# Altium PCB Board.PcbDoc
Units mm, origin at the board's own origin, x right, y up, seen from the top; angles counter-clockwise.
Board outline 100.1 x 45.5 mm, 4 copper layers (Top Layer, Gnd top, Gnd bot, Bottom Layer), stack 1.587 mm thick; 40 components, 18 nets, 112 pads, 31 vias.
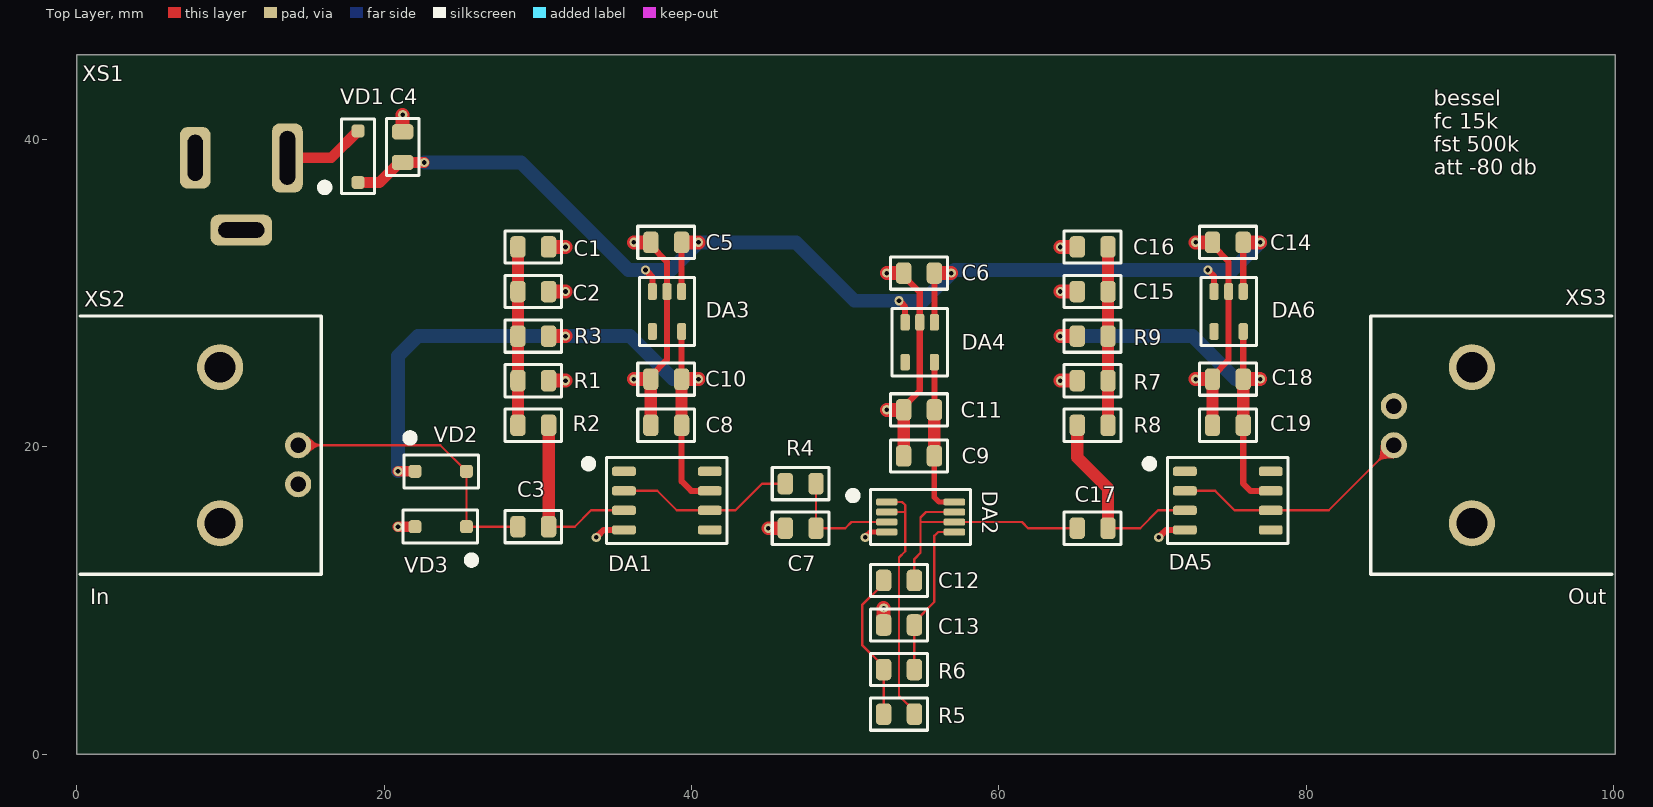
[diagram p0: Top Layer view]
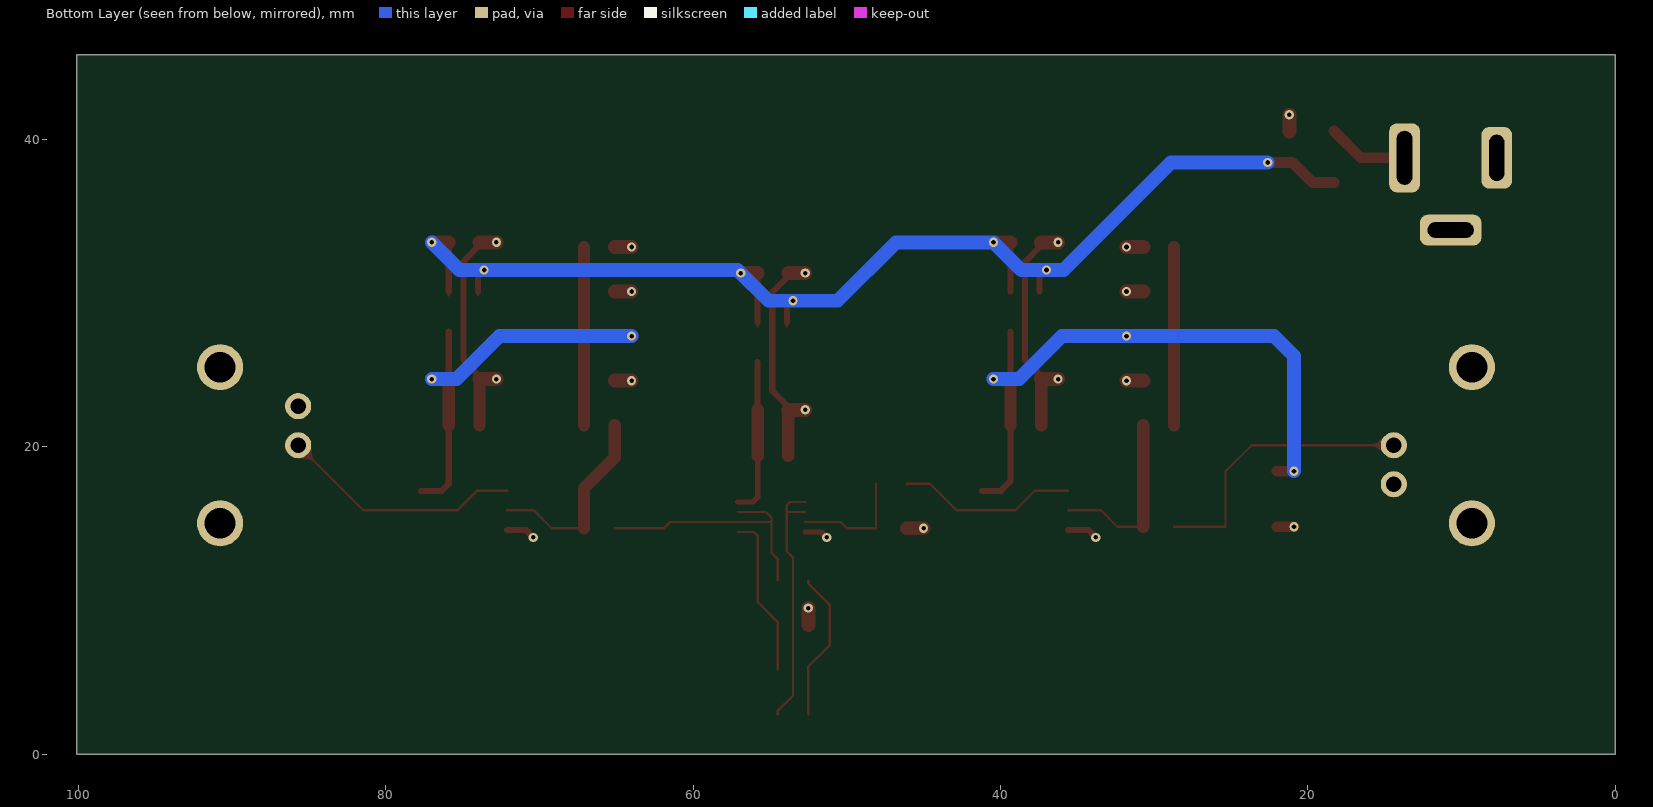
[diagram p1: Bottom Layer view, seen from below]
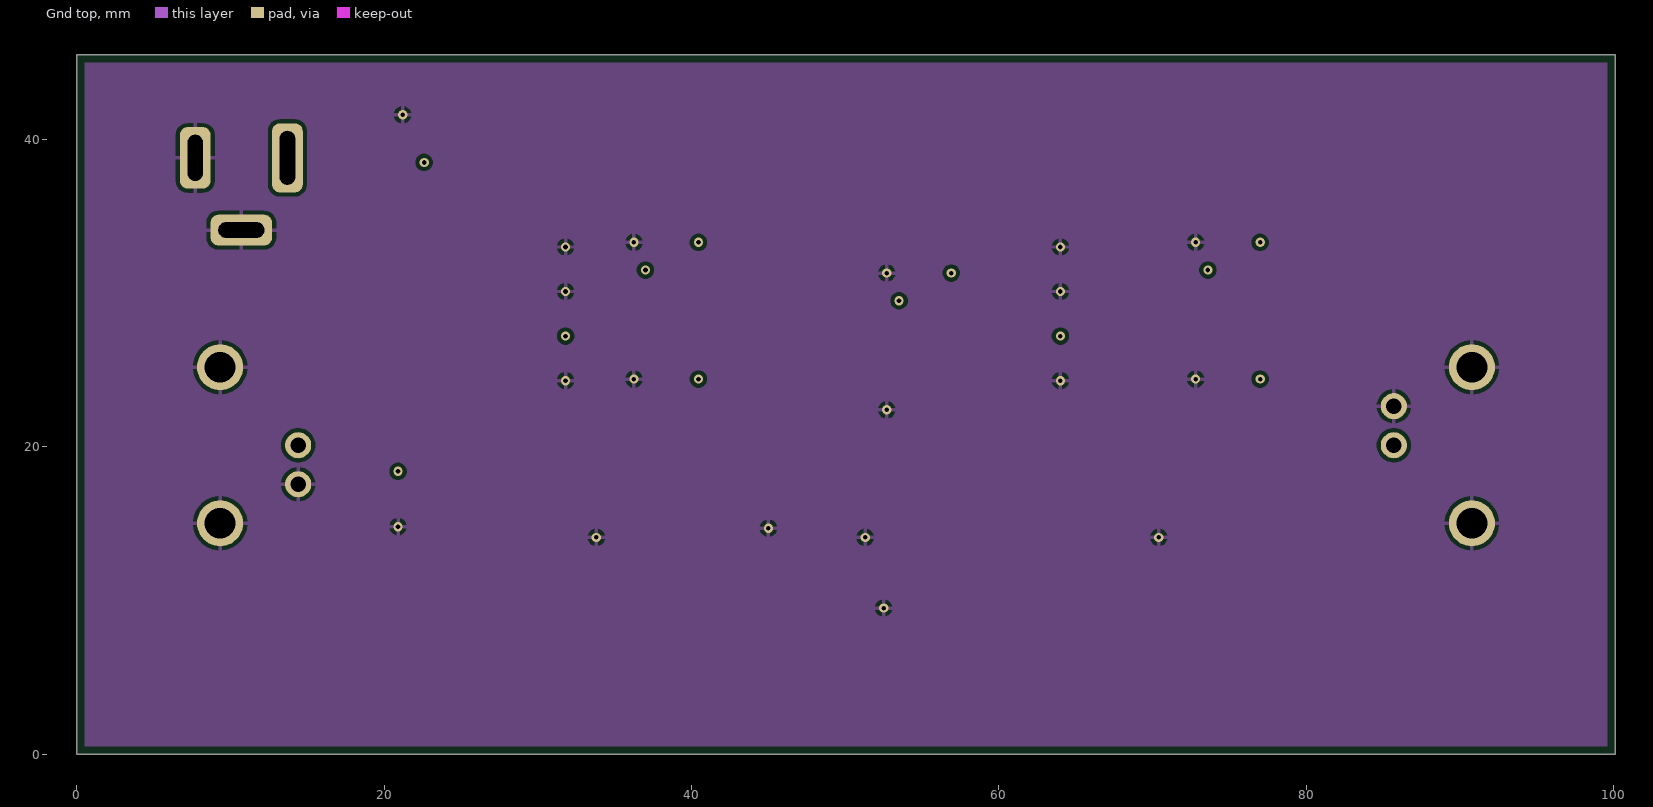
[diagram p2: Gnd top]
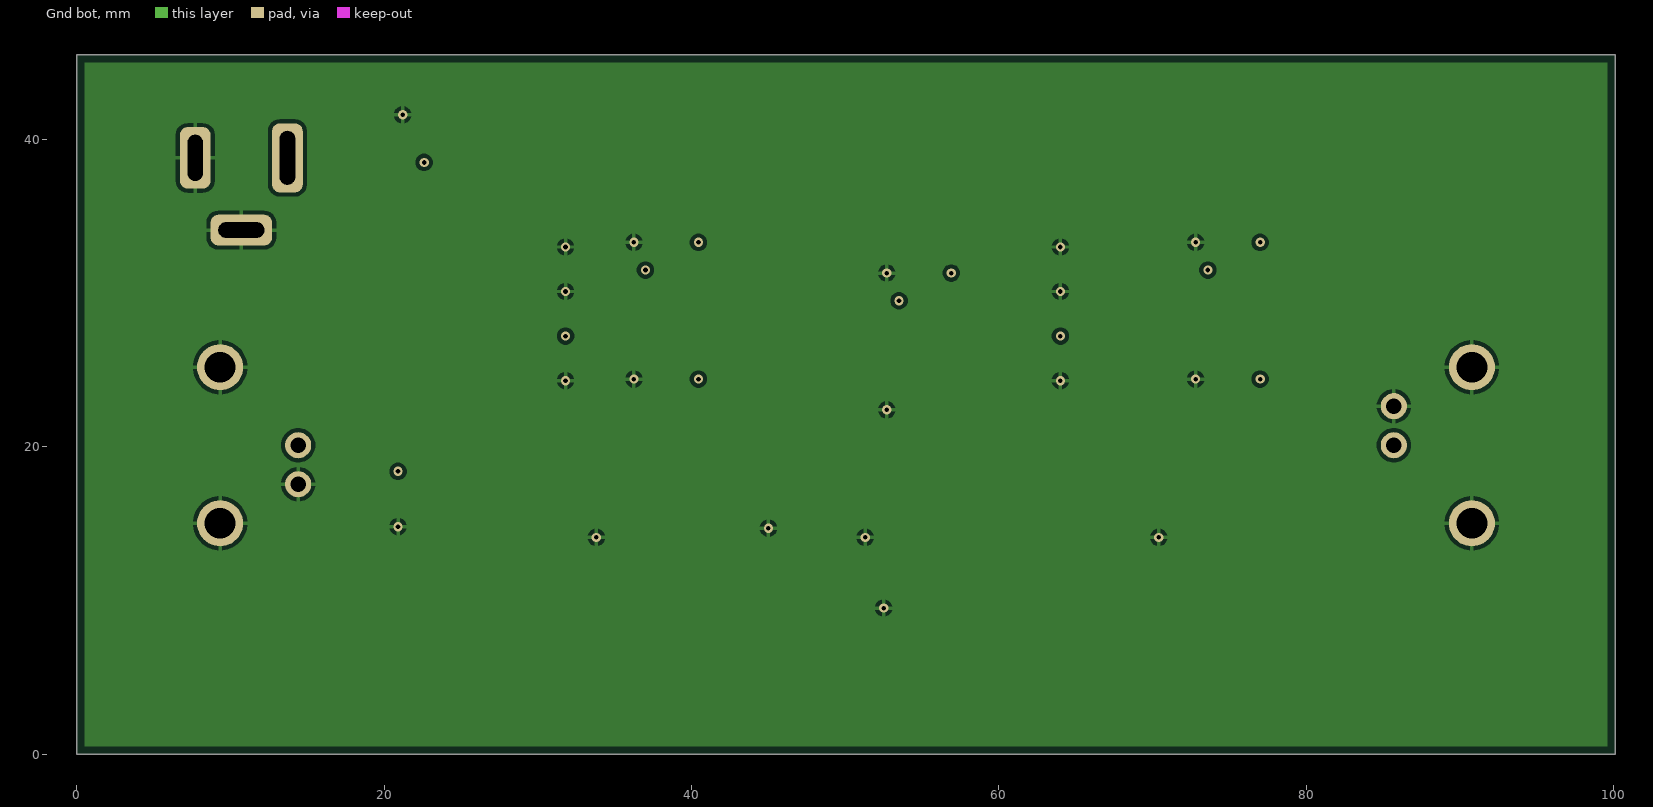
[diagram p3: Gnd bot]
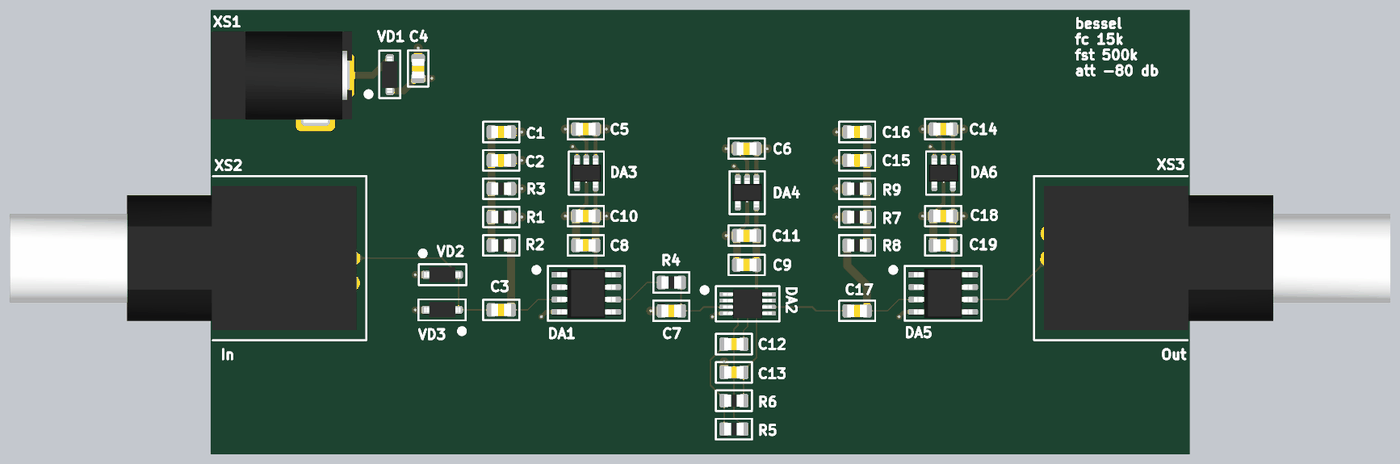
[diagram p4: 3D render of the assembled board from above, using the file's embedded part models]

## Layer stack, top to bottom
Top Solder: solder mask 0.0102, Solder Resist, Dk 3.3
Top Layer: signal copper 0.0356
Dielectric 2: prepreg 0.2104, PP-006, Dk 4.4
Gnd top: signal copper 0.0152
Dielectric 1: dielectric 1.065, FR-4, Dk 4.6
Gnd bot: signal copper 0.0152
Dielectric 3: prepreg 0.2104, PP-006, Dk 4.4
Bottom Layer: signal copper 0.0356
Bottom Solder: solder mask 0.0102, Solder Resist, Dk 3.3

## Board outline
0,0 100.1,0 100.1,45.5 0,45.5

## Design rules (kind name [scope] priority, off if disabled: settings)
Clearance [All] p1: gap=0.254 ignorepadtopadclearanceinfootprint=FALSE except(0: Arc-Hole Track-Hole SMDPad-Hole THPad-Hole Via-Hole Fill-Hole Poly-Hole Region-Hole Text-Hole; 0.1: Arc-Arc Arc-Track Arc-THPad Track-Track Track-THPad SMDPad-THPad; 0.15: Arc-SMDPad Track-SMDPad SMDPad-SMDPad; 0.2: Arc-Via Track-Via SMDPad-Via THPad-Via Via-Via)
HoleSize [All] p1: absolutevalues=TRUE maxlimit=6.3 minlimit=0.15 maxpercent=80.000 minpercent=20.000
HoleToHoleClearance [All] p1: gap=0.45 allowstackedmicrovias=TRUE
MinimumSolderMaskSliver [All] p1: minsoldermaskwidth=0.1
PolygonConnect [All] p1: connectstyle=Relief reliefconductorwidth=0.254 reliefentries=4 polygonreliefangle="90 Angle" airgapwidth=0.254
RoutingVias [All] p1: holewidth=0.3 width=0.6 viastyle="Through Hole" minholewidth=0.15 minwidth=0.3 maxholewidth=0.3 maxwidth=0.6
SilkToSilkClearance [All] p1: silktosilkclearance=0.15
SilkToSolderMaskClearance [IsPad] p1: minsilkscreentomaskgap=0.15 clearancetoexposedcopper=TRUE
SolderMaskExpansion [All] p1: expansion=0.05 istentingtop=FALSE
Width [All] p1: maxlimit=2 minlimit=0.1 preferedwidth=0.15
25 further rules are at their usual default settings.

## Components (designator, comment, footprint, x,y, rotation, side; value= is the part's Value field where it differs from the comment)
C1 "10 uF x 10 V" CAPC2012X06N 30.7,33 r180 top
C2 "0.1 uF x 100 V" CAPC2012X06N 28.7,30.1 r0 top
C3 "0.1 uF x 100 V" CAPC2012X06N 30.7,14.8 r180 top
C4 "10 uF x 10 V" CAPC2012X06N 21.2,38.5 r90 top
C5 "10 uF x 10 V" CAPC2012X06N 39.35,33.3 r180 top
C6 "10 uF x 10 V" CAPC2012X06N 55.8,31.3 r180 top
C7 "1 nF x 450 V" CAPC2012X06N 48.1,14.7 r180 top
C8 "0.1 uF x 100 V" CAPC2012X06N 39.35,21.4 r180 top
C9 "0.1 uF x 100 V" CAPC2012X06N 55.8,19.4 r180 top
C10 "10 uF x 10 V" CAPC2012X06N 39.35,24.4 r180 top
C11 "10 uF x 10 V" CAPC2012X06N 55.8,22.4 r180 top
C12 "2 nF x 25 V" CAPC2012X06N 52.5,11.3 r0 top
C13 "1 nF x 450 V" CAPC2012X06N 54.5,8.4 r180 top
C14 "10 uF x 10 V" CAPC2012X06N 75.9,33.3 r180 top
C15 "10 uF x 10 V" CAPC2012X06N 65.1,30.1 r0 top
C16 "0.1 uF x 100 V" CAPC2012X06N 67.1,33 r180 top
C17 "0.1 uF x 100 V" CAPC2012X06N 67.1,14.7 r180 top
C18 "0.1 uF x 100 V" CAPC2012X06N 75.9,24.4 r180 top
C19 "10 uF x 10 V" CAPC2012X06N 75.9,21.4 r180 top
DA1 "OPA735AID" D0008A 35.6,18.4 r0 top
DA2 "OPA2735AIDGKR" DGK0008A 52.7,16.4 r0 top
DA3 "TPS76301DBVT" DBV0005A 38.4,28.8 r270 top
DA4 "TPS76301DBVT" DBV0005A 54.85,26.8 r270 top
DA5 "OPA735AID" D0008A 72.1,18.4 r0 top
DA6 "TPS76301DBVT" DBV0005A 74.95,28.8 r270 top
R1 "100 kOhms" RESC2012X06N 28.7,24.3 r0 top
R2 "100 kOhms" RESC2012X06N 30.7,21.4 r180 top
R3 "100 kOhms" RESC2012X06N 30.7,27.2 r180 top
R4 "8.06 kOhms" RESC2012X06N 46.1,17.6 r0 top
R5 "4.42 kOhms" RESC2012X06N 54.5,2.6 r180 top
R6 "6.19 kOhms" RESC2012X06N 52.5,5.5 r0 top
R7 "100 kOhms" RESC2012X06N 67.1,24.3 r180 top
R8 "100 kOhms" RESC2012X06N 65.1,21.4 r0 top
R9 "100 kOhms" RESC2012X06N 65.1,27.2 r0 top
VD1 "BAT54W-HG3-18" SOD-123 18.3,37.2 r90 top
VD2 "BAT54W-HG3-18" SOD-123 22,18.4 r0 top
VD3 "BAT54W-HG3-18" SOD-123 25.35,14.8 r180 top
XS1 "PJ-002AH" "PJ-002AH (Same Sky)" 13.7,38.8 r0 top
XS2 "0731385003" "0731385003 (Molex)" 14.4,20.1 r0 top
XS3 "0731385003" "0731385003 (Molex)" 85.7,20.1 r180 top

## Footprints (in the part's own frame and the unit in brackets; to place one, negate y for a bottom-side part, rotate by r counter-clockwise, add the part's x,y. Pads: shape width x height; smd on the part's side, far side on the other; paste and mask are expansions set on the pad)
"0731385003 (Molex)" [mm] "BNC Connector Jack, 4-Leads, Body 35.45x14.75 mm"
  round 1.7 hole 1: 1(0,0) 2(0,-2.54)
  round 3 hole 2: 3(-5.08,5.08) 4(-5.08,-5.08)
  silkscreen extent -14.2,-8.4 1.5,8.4, body extent -34.95,-7.37 0.5,7.37, height 15.88
CAPC2012X06N [mm] "Chip Capacitor, 2-Leads, Body 2.00x1.25mm, IPC Medium Density"
  rrect50% 1x1.4 smd mask+0.05: 1(0,0) 2(2,0)
  silkscreen extent -0.85,-1.05 2.85,1.05, body extent 0,-0.63 2,0.63, height 1.25
D0008A [mm] "SOIC, 8-Leads, Body 5.00x3.90 mm, IPC Medium Density"
  rrect50% 1.55x0.6 smd mask+0.05: 1(0,0) 2(0,-1.27) 3(0,-2.54) 4(0,-3.81) 5(5.588,-3.81) 6(5.588,-2.54) 7(5.588,-1.27) 8(5.588,0)
  silkscreen extent -2.56,-4.7 6.72,0.89, body extent -0.21,-4.41 5.79,0.6, height 1.75
DBV0005A [mm] "SOT-23, 5-Leads, Body 3.00x1.75 mm, IPC Medium Density"
  rrect50% 1.1x0.6 smd mask+0.05: 1(-1.3,0.95) 2(-1.3,0) 3(-1.3,-0.95) 4(1.3,-0.95) 5(1.3,0.95)
  silkscreen extent -2.2,-1.8 2.2,1.8, body extent -1.5,-1.5 1.5,1.5, height 1.45
DGK0008A [mm] "VSSOP, 8-Leads, Body 3.00x3.00 mm, IPC Medium Density"
  rrect50% 1.4x0.45 smd mask+0.03: 1(0,0) 2(0,-0.65) 3(0,-1.3) 4(0,-1.95) 5(4.4,-1.95) 6(4.4,-1.3) 7(4.4,-0.65) 8(4.4,0)
  silkscreen extent -2.45,-2.77 5.45,0.82, body extent -0.3,-2.47 4.7,0.53, height 1.1
"PJ-002AH (Same Sky)" [mm] "Connector, 3-Leads, Body 14.40x9.00 mm"
  rrect50% 2x4.5 hole 1 slot 3.5 at 90 deg mask+0.05: 1(0,0)
  rrect50% 2x4 hole 1 slot 3 at 90 deg mask+0.05: 2(-6,0)
  rrect50% 4x2 hole 1 slot 3 at 0 deg mask+0.05: 3(-3,-4.7)
  body extent -13.65,-4.9 0.75,4.5, height 11
RESC2012X06N [mm] "Chip Resistor, 2-Leads, Body 2.00x1.25mm, IPC Medium Density"
  rrect50% 1x1.4 smd mask+0.05: 1(0,0) 2(2,0)
  silkscreen extent -0.85,-1.05 2.85,1.05, body extent 0,-0.63 2,0.63, height 1.25
SOD-123 [mm] "Chip Diode, 2-Leads, Body 2.70x1.55mm, IPC Medium Density"
  rrect50% 0.85x0.85 smd mask+0.05: 1(0,0) 2(3.35,0)
  silkscreen extent -0.72,-1.07 4.13,2.42, body extent -0.17,-0.77 3.52,0.77, height 1.17

## Part data
C1 C4 C5 C6 C10 C11 C14 C15 C19: library part KGM21AR71A106KU, "MLCC - Multilayer Ceramic Capacitors", Capacitance="10 uF", Package=0805, Tolerance=10%, Voltage Rating="10 V"
C2 C3 C8 C9 C16 C17 C18: library part C2012X7R2A104K125AE, "MLCC - Multilayer Ceramic Capacitors", Capacitance="0.1 uF", Package=0805, Tolerance=10%, Voltage Rating="100 V"
C7 C13: library part C2012NP02W102J060AA, "MLCC - Multilayer Ceramic Capacitors", Capacitance="1 nF", Package=0805, Tolerance=5%, Voltage Rating="450 V"
C12: library part 08053A202JAT2A, "MLCC - Multilayer Ceramic Capacitors", Capacitance="2 nF", Package=0805, Tolerance=5%, Voltage Rating="25 V"
DA1 DA2 DA5: "0.05µV/°C max, SINGLE-SUPPLY CMOS OPERATIONAL AMPLIFIERS Zer∅-Drift Series"
DA3 DA4 DA6: "150mA, 10V, Low-Dropout Voltage Regulator"
R1 R2 R3 R7 R8 R9: library part ERJ-HP6J104V, "Thick Film Chip Resistors", Package=0805, Tolerance=5%, Resistance="100 kOhms"
R4: library part ERJ-P06F8061V, "Thick Film Chip Resistors", Package=0805, Tolerance=1%, Resistance="8.06 kOhms"
R5: library part ERJ-6RBD4421V, "Thick Film Chip Resistors", Package=0805, Tolerance=0.5%, Resistance="4.42 kOhms"
R6: library part ERJ-HP6F6191V, "Thick Film Chip Resistors", Package=0805, Tolerance=1%, Resistance="6.19 kOhms"
VD1 VD2 VD3: "Schottky Diodes & Rectifiers 30V Schottky DIODE"
XS1: "DC POWER JACK"
XS2 XS3: "BNC Connector Jack"

## Via types
v1: diameter 0.6, hole 0.3, Top Layer to Bottom Layer, tented both sides, 31 vias

## Nets (pads, with @x,y where several pads share a name; then routed paths per layer and width w, separated by ;. In a path a pad name is that pad's centre, name@x,y a point inside that pad or via, vN(x,y) a via of type N, cw(c..) or ccw(c..) an arc to the next point about the centre after c; other vN are vias at no path point)
+3.3V_filter: C9.1 C11.1 DA2.8 DA4.5 | length 10.2
  Top Layer w0.35: C9.1 55.8,16.7 56.1,16.4 DA2.8
  Top Layer w0.4: C11.1 DA4.5
  Top Layer w0.8: C9.1 C11.1
+3.3V_in_buf: C8.1 C10.1 DA1.7 DA3.5 R3.1 VD2.1 | length 43.9
  Top Layer w0.4: C8.1 39.35,17.75 39.97,17.13 DA1.7 ; C10.1 DA3.5
  Top Layer w0.7: v1(20.9,18.4) VD2.1
  Top Layer w0.8: C8.1 C10.1
  Top Layer w0.9: R3.1 v1(31.8,27.2) ; C10.1 v1(40.45,24.4)
  Bottom Layer w0.9: v1(20.9,18.4) 20.9,25.9 22.2,27.2 v1(31.8,27.2) 36,27.2 38.8,24.4 v1(40.45,24.4)
+3.3V_out_buf: C18.1 C19.1 DA5.7 DA6.5 R9.1 | length 28.2
  Top Layer w0.4: C19.1 75.9,17.6 76.37,17.13 DA5.7 ; C18.1 DA6.5
  Top Layer w0.8: C19.1 C18.1
  Top Layer w0.9: v1(64,27.2) R9.1 ; C18.1 v1(77,24.4)
  Bottom Layer w0.9: v1(64,27.2) 72.6,27.2 75.4,24.4 v1(77,24.4)
+9V: C4.1 C5.1 C6.1 C14.1 DA3.1 DA3.3 DA4.1 DA4.3 DA6.1 DA6.3 VD1.1 | length 84.6
  Top Layer w0.15: C4.1@21,38.5 C4.1 ; DA4.3@53.9,27.85 DA4.3 ; DA4.1@55.8,27.85 DA4.1 ; DA6.3@74,29.85 DA6.3 ; DA6.1@75.9,29.85 DA6.1
  Top Layer w0.4: v1(37,31.5) 37.45,31.05 DA3.3 ; DA3.1 C5.1 ; v1(53.5,29.5) 53.9,29.1 DA4.3 ; DA4.1 C6.1 ; v1(73.6,31.5) 74,31.1 DA6.3 ; DA6.1 C14.1
  Top Layer w0.7: VD1.1 19.7,37.2 C4.1@21,38.5 ; C4.1 v1(22.6,38.5)
  Top Layer w0.9: C5.1 v1(40.45,33.3) ; C6.1 v1(56.9,31.3) ; C14.1 v1(77,33.3)
  Bottom Layer w0.9: v1(22.6,38.5) 28.9,38.5 35.9,31.5 38.65,31.5 v1(40.45,33.3) 46.8,33.3 50.6,29.5 v1(53.5,29.5) 55.1,29.5 57.1,31.5 v1(73.6,31.5) 75.2,31.5 v1(77,33.3)
GND: C1.1 C2.2 C4.2 C5.2 C6.2 C7.2 C8.2 C9.2 C10.2 C11.2 C13.2 C14.2 C15.1 C16.2 C18.2 C19.2 DA1.4 DA2.4 DA3.2 DA4.2 DA5.4 DA6.2 R1.2 R7.2 VD3.2 XS1.2 XS1.3 XS2.2 XS2.3 XS2.4 XS3.2 XS3.3 XS3.4 | length 61.4
  Top Layer w0.15: C5.2@37.35,33.1 C5.2 ; C6.2@53.8,31.1 C6.2 ; C14.2@73.9,33.1 C14.2
  Top Layer w0.35: v1(51.3,14.1) 51.65,14.45 DA2.4
  Top Layer w0.4: v1(33.8,14.1) 34.29,14.59 DA1.4 ; C10.2 37.35,24.6 38.4,25.65 DA3.2 38.4,32.05 C5.2@37.35,33.1 ; C11.2 53.8,22.6 54.85,23.65 DA4.2 54.85,30.05 C6.2@53.8,31.1 ; v1(70.4,14.1) 70.89,14.59 DA5.4 ; C18.2 73.9,24.6 74.95,25.65 DA6.2 74.95,32.05 C14.2@73.9,33.1
  Top Layer w0.7: v1(20.9,14.8) VD3.2
  Top Layer w0.8: C8.2 C10.2 ; C9.2 C11.2 ; C19.2 C18.2
  Top Layer w0.9: C4.2 v1(21.2,41.6) ; R1.2 v1(31.8,24.3) ; C2.2 v1(31.8,30.1) ; C1.1 v1(31.8,33) ; v1(36.25,24.4) C10.2 ; v1(36.25,33.3) C5.2 ; v1(45,14.7) C7.2 ; C13.2 v1(52.5,9.5) ; v1(52.7,22.4) C11.2 ; v1(52.7,31.3) C6.2 ; v1(64,24.3) R7.2 ; v1(64,30.1) C15.1 ; v1(64,33) C16.2 ; v1(72.8,24.4) C18.2 ; v1(72.8,33.3) C14.2
NetC1_2: C1.2 C2.1 R1.1 R2.2 R3.2 | length 11.6
  Top Layer w0.8: R2.2 R1.1 R3.2 C2.1 C1.2
NetC3_1: C3.1 DA1.3 R2.1 | length 11.9
  Top Layer w0.15: C3.1 32.4,14.8 33.46,15.86 DA1.3
  Top Layer w0.8: C3.1 R2.1
NetC3_2: C3.2 VD2.2 VD3.1 XS2.1 | length 18.6
  Top Layer w0.15: XS2.1 23.65,20.1 VD2.2 VD3.1 C3.2
NetC7_1: C7.1 DA2.3 R4.2 | length 7.7
  Top Layer w0.15: R4.2 C7.1 50,14.7 50.4,15.1 DA2.3
NetC12_1: C12.1 R5.2 R6.1 | length 9.9
  Top Layer w0.15: R5.2 R6.1 52.5,5.7 51.1,7.1 51.1,9.7 52.5,11.1 C12.1
NetC12_2: C12.2 C17.2 DA2.6 DA2.7 | length 17
  Top Layer w0.15: C12.2 54.5,12.7 54.9,13.1 54.9,15.1 ; DA2.7 55.25,15.75 54.9,15.4 54.9,15.1 ; C17.2 61.9,14.7 61.5,15.1 DA2.6 54.9,15.1
NetC13_1: C13.1 DA2.5 R6.2 | length 10.6
  Top Layer w0.15: R6.2 C13.1 54.5,8.6 55.8,9.9 55.8,14.2 56.05,14.45 DA2.5
NetC15_2: C15.2 C16.1 R7.1 R8.2 R9.2 | length 11.6
  Top Layer w0.8: R8.2 R7.1 R9.2 C15.2 C16.1
NetC17_1: C17.1 DA5.3 R8.1 | length 13
  Top Layer w0.15: C17.1 69.2,14.7 70.36,15.86 DA5.3
  Top Layer w0.8: R8.1 65.1,19.3 67.1,17.3 C17.1
NetDA1_2: DA1.2 DA1.6 R4.1 | length 11.7
  Top Layer w0.15: DA1.2 37.77,17.13 39.04,15.86 DA1.6 42.86,15.86 44.6,17.6 R4.1
NetDA2_1: DA2.1 DA2.2 R5.1 | length 16.7
  Top Layer w0.15: DA2.2 53.85,15.75 53.9,15.8 ; DA2.1 53.7,16.4 53.9,16.2 53.9,15.8 ; R5.1 54.5,2.8 53.5,3.8 53.5,12.8 53.9,13.2 53.9,15.8
NetDA5_2: DA5.2 DA5.6 XS3.1 | length 15.9
  Top Layer w0.15: DA5.2 74.07,17.13 75.34,15.86 DA5.6 81.46,15.86 XS3.1
NetVD1_2: VD1.2 XS1.1 | length 5.3
  Top Layer w0.7: XS1.1 16.55,38.8 VD1.2
pads on no net: DA1.1 DA1.5 DA1.8 DA3.4 DA4.4 DA5.1 DA5.5 DA5.8 DA6.4

## Polygon pours and split planes (outlines as drawn)
GND on Gnd top "GND_L02_P000" (solid, pour order 0): 0.5,45 0.5,0.5 99.6,0.5 99.6,45
GND on Gnd bot "GND_L03_P001" (solid, pour order 1): 0.5,45 99.6,45 99.6,0.5 0.5,0.5

## Silkscreen, mask and mechanical layers (free items; w line width, h text height)
Top Overlay:
  text "bessel / fc 15k / fst 500k / att -80 db" at 88.3,37.7 h1
  text "In" at 0.854,9.754 h1
  text "Out" at 97.054,9.754 h1
Board:
  the board outline again, w0.1